# EAGLE board Real Time Clock-Module-Panel-v10 (EAGLE 4.16)
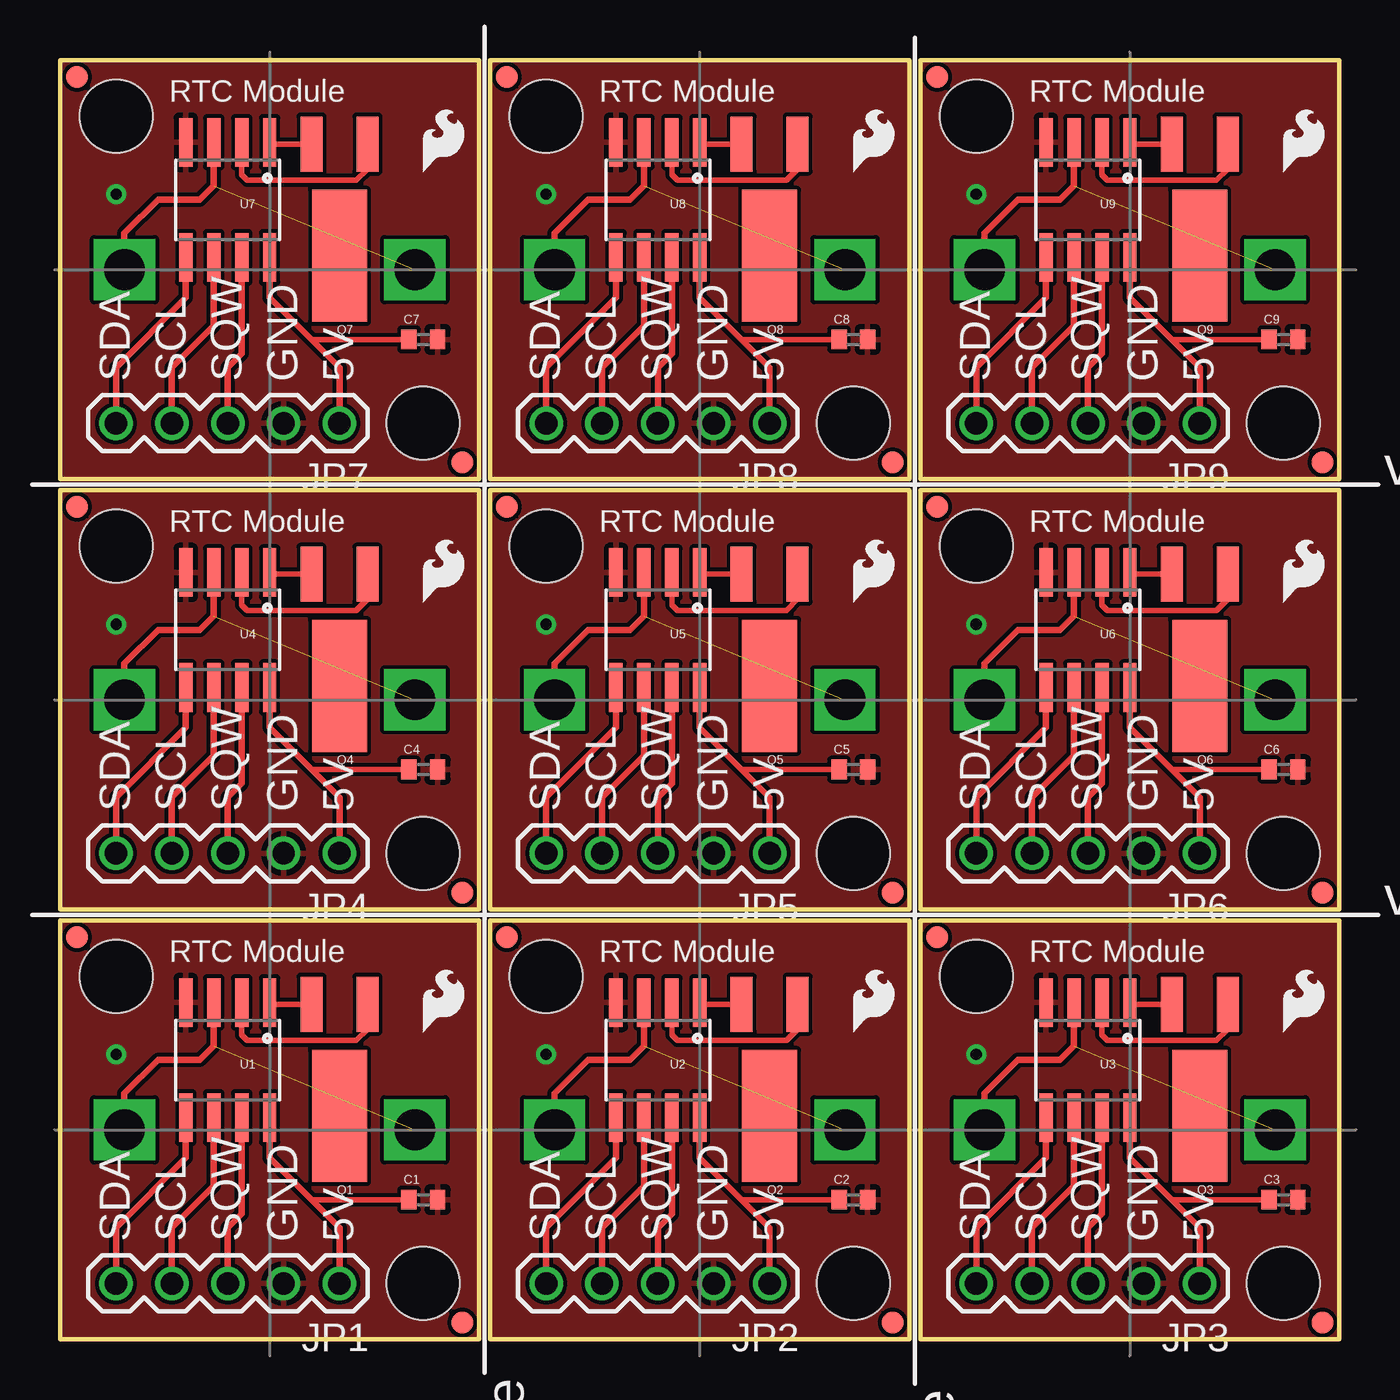
[diagram p0: board, top side]
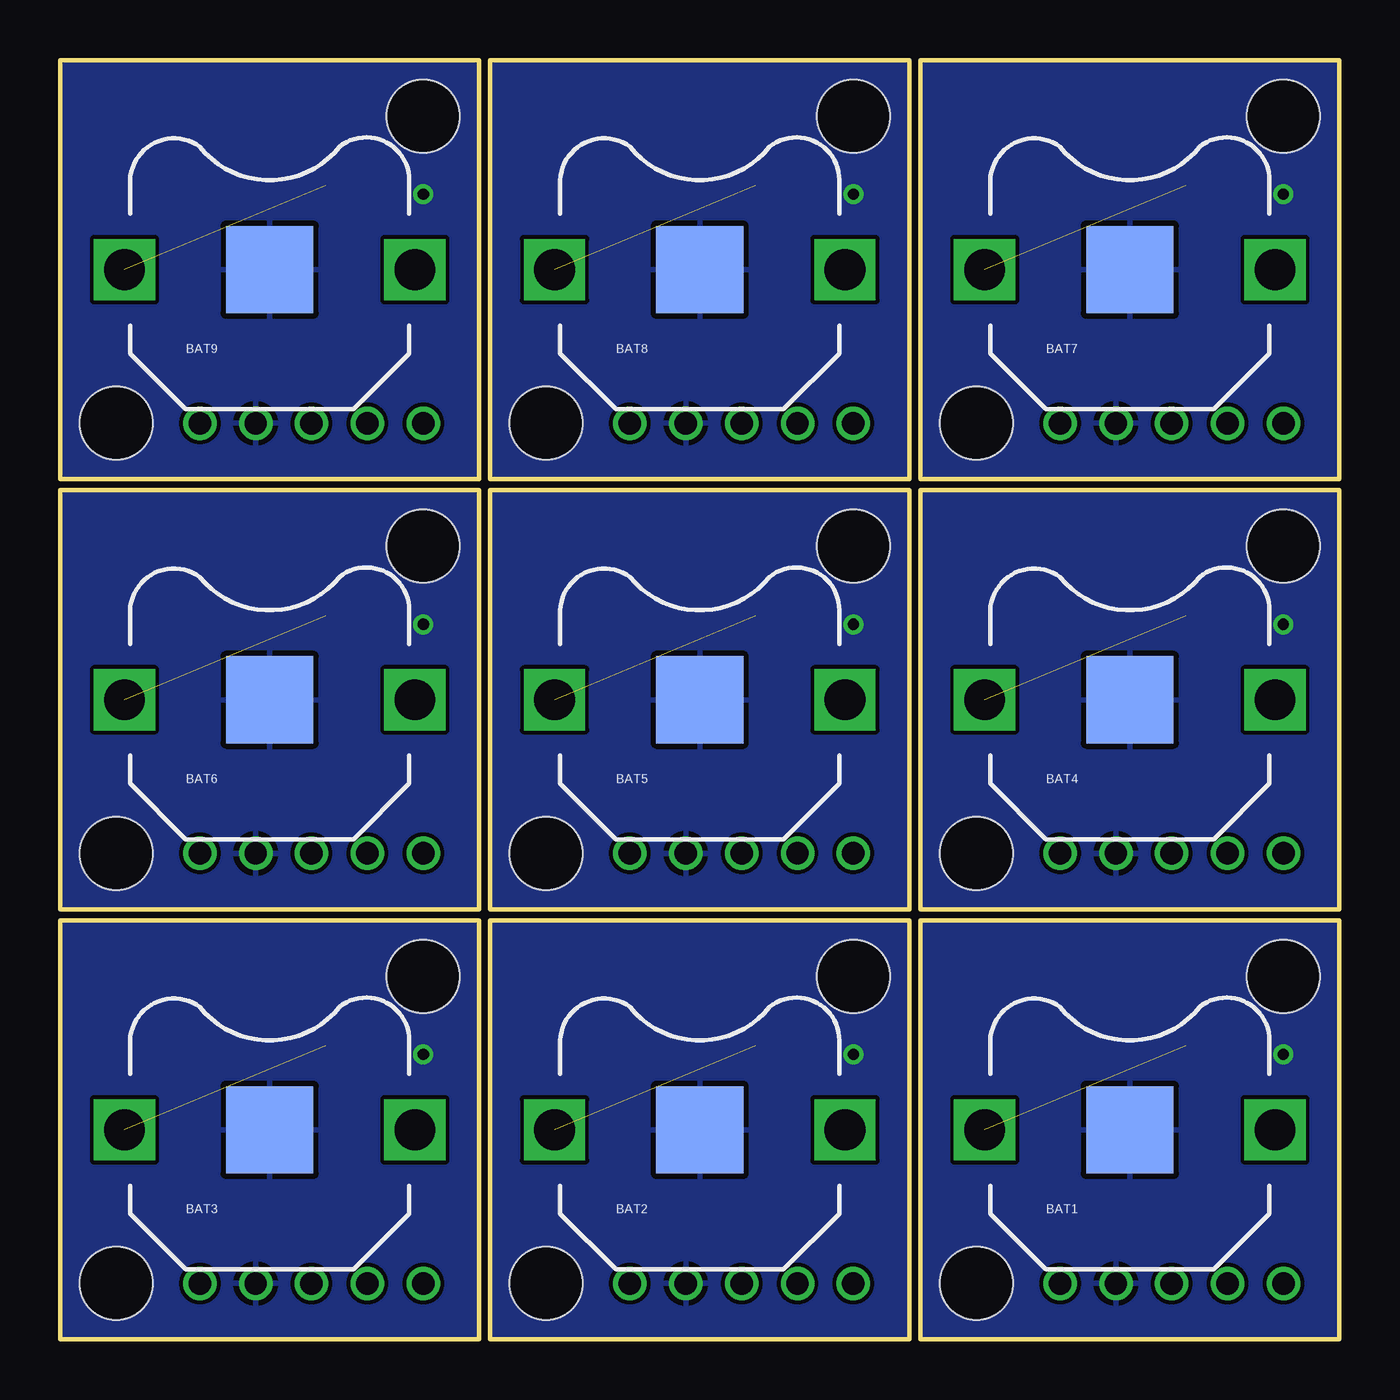
[diagram p1: board, bottom side, seen from below]

Size 58.17 x 58.17 mm. Coordinates in mm from the lower left corner, seen from the top.
Outline: 0,0 19.05,0 19.05,19.05 0,19.05 0,0
Outline: 19.56,0 38.61,0 38.61,19.05 19.56,19.05 19.56,0
Outline: 39.12,0 58.17,0 58.17,19.05 39.12,19.05 39.12,0
Outline: 0,19.56 19.05,19.56 19.05,38.61 0,38.61 0,19.56
Outline: 19.56,19.56 38.61,19.56 38.61,38.61 19.56,38.61 19.56,19.56
Outline: 39.12,19.56 58.17,19.56 58.17,38.61 39.12,38.61 39.12,19.56
Outline: 0,39.12 19.05,39.12 19.05,58.17 0,58.17 0,39.12
Outline: 19.56,39.12 38.61,39.12 38.61,58.17 19.56,58.17 19.56,39.12
Outline: 39.12,39.12 58.17,39.12 58.17,58.17 39.12,58.17 39.12,39.12
Copper layers (1*16): Top 0.035mm / dielectric 1.5mm / Bottom 0.035mm
Design rules "default": minimum track width 8mil, minimum drill 20mil, track to track 7mil, track to pad 7mil, pad to pad 7mil, via to via 7mil, smd to smd 8mil, copper to edge 0mil, drill to drill 8mil, minimum pad ring 10mil, minimum via ring 8mil, stop-mask expansion 4mil, vias tented up to drill 0mil, thermal gap 10mil

## Footprints (pad centres in the part's own frame; a part is rotated, then mirrored left to right if it is on the bottom)
BATTCON_12MM_PTH = smd 3.962 x 3.962: GND 0,0 | drill 1.854 square: VCC@1 -6.604,0; VCC@2 6.604,0
C0402 = smd 0.7 x 0.9: 1 -0.65,0; 2 0.65,0
FIDUCIAL-1X2 = smd 1 x 1: 1 0,0
1X05 = drill 1.016 round: 1 0,0; 2 2.54,0; 3 5.08,0; 4 7.62,0; 5 10.16,0
CRYSTAL-32KHZ-SMD = smd 2.5 x 6: SHEILD 0,5.08 | smd 1 x 2.5: X1 -1.27,0; X2 1.27,0
SO08 = smd 0.61 x 2.21: 1 -1.905,-2.616; 2 -0.635,-2.616; 3 0.635,-2.616; 4 1.905,-2.616; 5 1.905,2.616; 6 0.635,2.616; 7 -0.635,2.616; 8 -1.905,2.616
STAND-OFF = hole 3.302: 0,0

## Placement (x,y rotation side)
BAT1  [BATTCON_12MM_PTH]  9.53,9.53 0 bottom
BAT2  [BATTCON_12MM_PTH]  29.08,9.53 0 bottom
BAT3  [BATTCON_12MM_PTH]  48.64,9.53 0 bottom
BAT4  [BATTCON_12MM_PTH]  9.53,29.08 0 bottom
BAT5  [BATTCON_12MM_PTH]  29.08,29.08 0 bottom
BAT6  [BATTCON_12MM_PTH]  48.64,29.08 0 bottom
BAT7  [BATTCON_12MM_PTH]  9.53,48.64 0 bottom
BAT8  [BATTCON_12MM_PTH]  29.08,48.64 0 bottom
BAT9  [BATTCON_12MM_PTH]  48.64,48.64 0 bottom
C1  [C0402]  16.51,6.35 0 top
C2  [C0402]  36.07,6.35 0 top
C3  [C0402]  55.63,6.35 0 top
C4  [C0402]  16.51,25.91 0 top
C5  [C0402]  36.07,25.91 0 top
C6  [C0402]  55.63,25.91 0 top
C7  [C0402]  16.51,45.47 0 top
C8  [C0402]  36.07,45.47 0 top
C9  [C0402]  55.63,45.47 0 top
E$1  [FIDUCIAL-1X2]  0.76,18.29 0 top
E$2  [FIDUCIAL-1X2]  18.29,0.76 0 top
E$3  [FIDUCIAL-1X2]  20.32,18.29 0 top
E$4  [FIDUCIAL-1X2]  37.85,0.76 0 top
E$5  [FIDUCIAL-1X2]  39.88,18.29 0 top
E$6  [FIDUCIAL-1X2]  57.4,0.76 0 top
E$7  [FIDUCIAL-1X2]  0.76,37.85 0 top
E$8  [FIDUCIAL-1X2]  18.29,20.32 0 top
E$9  [FIDUCIAL-1X2]  20.32,37.85 0 top
E$10  [FIDUCIAL-1X2]  37.85,20.32 0 top
E$11  [FIDUCIAL-1X2]  39.88,37.85 0 top
E$12  [FIDUCIAL-1X2]  57.4,20.32 0 top
E$13  [FIDUCIAL-1X2]  0.76,57.4 0 top
E$14  [FIDUCIAL-1X2]  18.29,39.88 0 top
E$15  [FIDUCIAL-1X2]  20.32,57.4 0 top
E$16  [FIDUCIAL-1X2]  37.85,39.88 0 top
E$17  [FIDUCIAL-1X2]  39.88,57.4 0 top
E$18  [FIDUCIAL-1X2]  57.4,39.88 0 top
JP1  [1X05]  12.7,2.54 180 top
JP2  [1X05]  32.26,2.54 180 top
JP3  [1X05]  51.82,2.54 180 top
JP4  [1X05]  12.7,22.1 180 top
JP5  [1X05]  32.26,22.1 180 top
JP6  [1X05]  51.82,22.1 180 top
JP7  [1X05]  12.7,41.66 180 top
JP8  [1X05]  32.26,41.66 180 top
JP9  [1X05]  51.82,41.66 180 top
Q1  32.768kHz  [CRYSTAL-32KHZ-SMD]  12.7,15.24 180 top
Q2  32.768kHz  [CRYSTAL-32KHZ-SMD]  32.26,15.24 180 top
Q3  32.768kHz  [CRYSTAL-32KHZ-SMD]  51.82,15.24 180 top
Q4  32.768kHz  [CRYSTAL-32KHZ-SMD]  12.7,34.8 180 top
Q5  32.768kHz  [CRYSTAL-32KHZ-SMD]  32.26,34.8 180 top
Q6  32.768kHz  [CRYSTAL-32KHZ-SMD]  51.82,34.8 180 top
Q7  32.768kHz  [CRYSTAL-32KHZ-SMD]  12.7,54.36 180 top
Q8  32.768kHz  [CRYSTAL-32KHZ-SMD]  32.26,54.36 180 top
Q9  32.768kHz  [CRYSTAL-32KHZ-SMD]  51.82,54.36 180 top
U1  DS1307  [SO08]  7.62,12.7 180 top
U2  DS1307  [SO08]  27.18,12.7 180 top
U3  DS1307  [SO08]  46.74,12.7 180 top
U4  DS1307  [SO08]  7.62,32.26 180 top
U5  DS1307  [SO08]  27.18,32.26 180 top
U6  DS1307  [SO08]  46.74,32.26 180 top
U7  DS1307  [SO08]  7.62,51.82 180 top
U8  DS1307  [SO08]  27.18,51.82 180 top
U9  DS1307  [SO08]  46.74,51.82 180 top
U$1  LOGO-SFESK  [SFE-LOGO-FLAME]  16.51,13.97 0 top
U$2  LOGO-SFESK  [SFE-LOGO-FLAME]  36.07,13.97 0 top
U$3  STAND-OFF  [STAND-OFF]  36.07,2.54 0 top
U$4  STAND-OFF  [STAND-OFF]  22.1,16.51 0 top
U$5  LOGO-SFESK  [SFE-LOGO-FLAME]  55.63,13.97 0 top
U$6  STAND-OFF  [STAND-OFF]  16.51,2.54 0 top
U$7  STAND-OFF  [STAND-OFF]  2.54,16.51 0 top
U$8  STAND-OFF  [STAND-OFF]  55.63,2.54 0 top
U$9  STAND-OFF  [STAND-OFF]  41.66,16.51 0 top
U$10  LOGO-SFESK  [SFE-LOGO-FLAME]  16.51,33.53 0 top
U$11  STAND-OFF  [STAND-OFF]  16.51,22.1 0 top
U$12  STAND-OFF  [STAND-OFF]  2.54,36.07 0 top
U$13  LOGO-SFESK  [SFE-LOGO-FLAME]  36.07,33.53 0 top
U$14  STAND-OFF  [STAND-OFF]  36.07,22.1 0 top
U$15  STAND-OFF  [STAND-OFF]  22.1,36.07 0 top
U$16  LOGO-SFESK  [SFE-LOGO-FLAME]  55.63,33.53 0 top
U$17  STAND-OFF  [STAND-OFF]  55.63,22.1 0 top
U$18  STAND-OFF  [STAND-OFF]  41.66,36.07 0 top
U$19  LOGO-SFESK  [SFE-LOGO-FLAME]  16.51,53.09 0 top
U$20  STAND-OFF  [STAND-OFF]  16.51,41.66 0 top
U$21  STAND-OFF  [STAND-OFF]  2.54,55.63 0 top
U$22  LOGO-SFESK  [SFE-LOGO-FLAME]  36.07,53.09 0 top
U$23  STAND-OFF  [STAND-OFF]  36.07,41.66 0 top
U$24  STAND-OFF  [STAND-OFF]  22.1,55.63 0 top
U$25  LOGO-SFESK  [SFE-LOGO-FLAME]  55.63,53.09 0 top
U$26  STAND-OFF  [STAND-OFF]  55.63,41.66 0 top
U$27  STAND-OFF  [STAND-OFF]  41.66,55.63 0 top

## Library data of the parts
BAT1-BAT9 C1-C9 E$1-E$18 JP1-JP9 Q1-Q9 U1-U9 U$1-U$27 = SparkFun

## Nets
GND: BAT1.GND C1.2 JP1.2 U1.4
GND1: BAT2.GND C2.2 JP2.2 U2.4
GND2: BAT3.GND C3.2 JP3.2 U3.4
GND3: BAT4.GND C4.2 JP4.2 U4.4
GND4: BAT5.GND C5.2 JP5.2 U5.4
GND5: BAT6.GND C6.2 JP6.2 U6.4
GND6: BAT7.GND C7.2 JP7.2 U7.4
GND7: BAT8.GND C8.2 JP8.2 U8.4
GND8: BAT9.GND C9.2 JP9.2 U9.4
N$1: Q1.X2 U1.1
N$2: Q1.X1 U1.2
N$3: Q2.X2 U2.1
N$4: BAT1.VCC@1 U1.3
N$5: Q2.X1 U2.2
N$6: BAT2.VCC@1 U2.3
N$7: Q3.X2 U3.1
N$8: Q3.X1 U3.2
N$9: BAT3.VCC@1 U3.3
N$10: Q4.X2 U4.1
N$11: Q4.X1 U4.2
N$12: BAT4.VCC@1 U4.3
N$13: Q5.X2 U5.1
N$14: Q5.X1 U5.2
N$15: BAT5.VCC@1 U5.3
N$16: Q6.X2 U6.1
N$17: Q6.X1 U6.2
N$18: BAT6.VCC@1 U6.3
N$19: Q7.X2 U7.1
N$20: Q7.X1 U7.2
N$21: BAT7.VCC@1 U7.3
N$22: Q8.X2 U8.1
N$23: Q8.X1 U8.2
N$24: BAT8.VCC@1 U8.3
N$25: Q9.X2 U9.1
N$26: Q9.X1 U9.2
N$27: BAT9.VCC@1 U9.3
SCL: JP1.4 U1.6
SCL1: JP2.4 U2.6
SCL2: JP3.4 U3.6
SCL3: JP4.4 U4.6
SCL4: JP5.4 U5.6
SCL5: JP6.4 U6.6
SCL6: JP7.4 U7.6
SCL7: JP8.4 U8.6
SCL8: JP9.4 U9.6
SDA: JP1.5 U1.5
SDA1: JP2.5 U2.5
SDA2: JP3.5 U3.5
SDA3: JP4.5 U4.5
SDA4: JP5.5 U5.5
SDA5: JP6.5 U6.5
SDA6: JP7.5 U7.5
SDA7: JP8.5 U8.5
SDA8: JP9.5 U9.5
SQW: JP1.3 U1.7
SQW1: JP2.3 U2.7
SQW2: JP3.3 U3.7
SQW3: JP4.3 U4.7
SQW4: JP5.3 U5.7
SQW5: JP6.3 U6.7
SQW6: JP7.3 U7.7
SQW7: JP8.3 U8.7
SQW8: JP9.3 U9.7
VCC: C1.1 JP1.1 U1.8
VCC1: C2.1 JP2.1 U2.8
VCC2: C3.1 JP3.1 U3.8
VCC3: C4.1 JP4.1 U4.8
VCC4: C5.1 JP5.1 U5.8
VCC5: C6.1 JP6.1 U6.8
VCC6: C7.1 JP7.1 U7.8
VCC7: C8.1 JP8.1 U8.8
VCC8: C9.1 JP9.1 U9.8

## Tracks (layer width: path | path; a pad name or v marks a point on that pad's centre or on a via)
GND  (via drill 0.51)
  other vias: 2.54,12.95
  pour Bottom: 0,0 0,19.05 19.05,19.05 19.05,0
  pour Top: 0,19.05 0,0 19.05,0 19.05,19.05
GND1  (via drill 0.51)
  other vias: 22.1,12.95
  pour Bottom: 19.56,0 19.56,19.05 38.61,19.05 38.61,0
  pour Top: 19.56,19.05 19.56,0 38.61,0 38.61,19.05
GND2  (via drill 0.51)
  other vias: 41.66,12.95
  pour Bottom: 39.12,0 39.12,19.05 58.17,19.05 58.17,0
  pour Top: 39.12,19.05 39.12,0 58.17,0 58.17,19.05
GND3  (via drill 0.51)
  other vias: 2.54,32.51
  pour Bottom: 0,19.56 0,38.61 19.05,38.61 19.05,19.56
  pour Top: 0,38.61 0,19.56 19.05,19.56 19.05,38.61
GND4  (via drill 0.51)
  other vias: 22.1,32.51
  pour Bottom: 19.56,19.56 19.56,38.61 38.61,38.61 38.61,19.56
  pour Top: 19.56,38.61 19.56,19.56 38.61,19.56 38.61,38.61
GND5  (via drill 0.51)
  other vias: 41.66,32.51
  pour Bottom: 39.12,19.56 39.12,38.61 58.17,38.61 58.17,19.56
  pour Top: 39.12,38.61 39.12,19.56 58.17,19.56 58.17,38.61
GND6  (via drill 0.51)
  other vias: 2.54,52.07
  pour Bottom: 0,39.12 0,58.17 19.05,58.17 19.05,39.12
  pour Top: 0,58.17 0,39.12 19.05,39.12 19.05,58.17
GND7  (via drill 0.51)
  other vias: 22.1,52.07
  pour Bottom: 19.56,39.12 19.56,58.17 38.61,58.17 38.61,39.12
  pour Top: 19.56,58.17 19.56,39.12 38.61,39.12 38.61,58.17
GND8  (via drill 0.51)
  other vias: 41.66,52.07
  pour Bottom: 39.12,39.12 39.12,58.17 58.17,58.17 58.17,39.12
  pour Top: 39.12,58.17 39.12,39.12 58.17,39.12 58.17,58.17
N$1
  Top 0.254: U1.1 9.53,15.24 Q1.X2
N$2
  Top 0.254: Q1.X1 13.97,14.1 13.46,13.59 8.51,13.59 8.26,13.84 U1.2
  Top 0.305: U1.2 8.26,15.37
N$3
  Top 0.254: U2.1 29.08,15.24 Q2.X2
N$4  (1 unrouted)
  Top 0.305: U1.3 6.99,13.34 6.35,12.7 4.45,12.7 2.92,11.18 2.92,9.53
N$5
  Top 0.254: Q2.X1 33.53,14.1 33.02,13.59 28.07,13.59 27.81,13.84 U2.2
  Top 0.305: U2.2 27.81,15.37
N$6  (1 unrouted)
  Top 0.305: U2.3 26.54,13.34 25.91,12.7 24,12.7 22.48,11.18 22.48,9.53
N$7
  Top 0.254: U3.1 48.64,15.24 Q3.X2
N$8
  Top 0.254: Q3.X1 53.09,14.1 52.58,13.59 47.62,13.59 47.37,13.84 U3.2
  Top 0.305: U3.2 47.37,15.37
N$9  (1 unrouted)
  Top 0.305: U3.3 46.1,13.34 45.47,12.7 43.56,12.7 42.04,11.18 42.04,9.53
N$10
  Top 0.254: U4.1 9.53,34.8 Q4.X2
N$11
  Top 0.254: Q4.X1 13.97,33.66 13.46,33.15 8.51,33.15 8.26,33.4 U4.2
  Top 0.305: U4.2 8.26,34.92
N$12  (1 unrouted)
  Top 0.305: U4.3 6.99,32.89 6.35,32.26 4.45,32.26 2.92,30.73 2.92,29.08
N$13
  Top 0.254: U5.1 29.08,34.8 Q5.X2
N$14
  Top 0.254: Q5.X1 33.53,33.66 33.02,33.15 28.07,33.15 27.81,33.4 U5.2
  Top 0.305: U5.2 27.81,34.92
N$15  (1 unrouted)
  Top 0.305: U5.3 26.54,32.89 25.91,32.26 24,32.26 22.48,30.73 22.48,29.08
N$16
  Top 0.254: U6.1 48.64,34.8 Q6.X2
N$17
  Top 0.254: Q6.X1 53.09,33.66 52.58,33.15 47.62,33.15 47.37,33.4 U6.2
  Top 0.305: U6.2 47.37,34.92
N$18  (1 unrouted)
  Top 0.305: U6.3 46.1,32.89 45.47,32.26 43.56,32.26 42.04,30.73 42.04,29.08
N$19
  Top 0.254: U7.1 9.53,54.36 Q7.X2
N$20
  Top 0.254: Q7.X1 13.97,53.21 13.46,52.7 8.51,52.7 8.26,52.96 U7.2
  Top 0.305: U7.2 8.26,54.48
N$21  (1 unrouted)
  Top 0.305: U7.3 6.99,52.45 6.35,51.82 4.45,51.82 2.92,50.29 2.92,48.64
N$22
  Top 0.254: U8.1 29.08,54.36 Q8.X2
N$23
  Top 0.254: Q8.X1 33.53,53.21 33.02,52.7 28.07,52.7 27.81,52.96 U8.2
  Top 0.305: U8.2 27.81,54.48
N$24  (1 unrouted)
  Top 0.305: U8.3 26.54,52.45 25.91,51.82 24,51.82 22.48,50.29 22.48,48.64
N$25
  Top 0.254: U9.1 48.64,54.36 Q9.X2
N$26
  Top 0.254: Q9.X1 53.09,53.21 52.58,52.7 47.62,52.7 47.37,52.96 U9.2
  Top 0.305: U9.2 47.37,54.48
N$27  (1 unrouted)
  Top 0.305: U9.3 46.1,52.45 45.47,51.82 43.56,51.82 42.04,50.29 42.04,48.64
SCL
  Top 0.305: U1.6 6.99,6.99 5.08,5.08 JP1.4
SCL1
  Top 0.305: U2.6 26.54,6.99 24.64,5.08 JP2.4
SCL2
  Top 0.305: U3.6 46.1,6.99 44.2,5.08 JP3.4
SCL3
  Top 0.305: U4.6 6.99,26.54 5.08,24.64 JP4.4
SCL4
  Top 0.305: U5.6 26.54,26.54 24.64,24.64 JP5.4
SCL5
  Top 0.305: U6.6 46.1,26.54 44.2,24.64 JP6.4
SCL6
  Top 0.305: U7.6 6.99,46.1 5.08,44.2 JP7.4
SCL7
  Top 0.305: U8.6 26.54,46.1 24.64,44.2 JP8.4
SCL8
  Top 0.305: U9.6 46.1,46.1 44.2,44.2 JP9.4
SDA
  Top 0.305: U1.5 5.71,8.26 2.54,5.08 JP1.5
SDA1
  Top 0.305: U2.5 25.27,8.26 22.1,5.08 JP2.5
SDA2
  Top 0.305: U3.5 44.83,8.26 41.66,5.08 JP3.5
SDA3
  Top 0.305: U4.5 5.71,27.81 2.54,24.64 JP4.5
SDA4
  Top 0.305: U5.5 25.27,27.81 22.1,24.64 JP5.5
SDA5
  Top 0.305: U6.5 44.83,27.81 41.66,24.64 JP6.5
SDA6
  Top 0.305: U7.5 5.71,47.37 2.54,44.2 JP7.5
SDA7
  Top 0.305: U8.5 25.27,47.37 22.1,44.2 JP8.5
SDA8
  Top 0.305: U9.5 44.83,47.37 41.66,44.2 JP9.5
SQW
  Top 0.305: U1.7 8.26,5.71 7.62,5.08 JP1.3
SQW1
  Top 0.305: U2.7 27.81,5.71 27.18,5.08 JP2.3
SQW2
  Top 0.305: U3.7 47.37,5.71 46.74,5.08 JP3.3
SQW3
  Top 0.305: U4.7 8.26,25.27 7.62,24.64 JP4.3
SQW4
  Top 0.305: U5.7 27.81,25.27 27.18,24.64 JP5.3
SQW5
  Top 0.305: U6.7 47.37,25.27 46.74,24.64 JP6.3
SQW6
  Top 0.305: U7.7 8.26,44.83 7.62,44.2 JP7.3
SQW7
  Top 0.305: U8.7 27.81,44.83 27.18,44.2 JP8.3
SQW8
  Top 0.305: U9.7 47.37,44.83 46.74,44.2 JP9.3
VCC
  Top 0.254: 11.43,6.35 C1.1
  Top 0.305: U1.8 9.53,9.53 | 9.53,9.53 9.53,8.26 11.43,6.35 12.7,5.08 JP1.1 | 9.53,9.53 9.54,9.51
VCC1
  Top 0.254: 30.99,6.35 C2.1
  Top 0.305: U2.8 29.08,9.53 | 29.08,9.53 29.08,8.26 30.99,6.35 32.26,5.08 JP2.1 | 29.08,9.53 29.1,9.51
VCC2
  Top 0.254: 50.55,6.35 C3.1
  Top 0.305: U3.8 48.64,9.53 | 48.64,9.53 48.64,8.26 50.55,6.35 51.82,5.08 JP3.1 | 48.64,9.53 48.66,9.51
VCC3
  Top 0.254: 11.43,25.91 C4.1
  Top 0.305: U4.8 9.53,29.08 | 9.53,29.08 9.53,27.81 11.43,25.91 12.7,24.64 JP4.1 | 9.53,29.08 9.54,29.07
VCC4
  Top 0.254: 30.99,25.91 C5.1
  Top 0.305: U5.8 29.08,29.08 | 29.08,29.08 29.08,27.81 30.99,25.91 32.26,24.64 JP5.1 | 29.08,29.08 29.1,29.07
VCC5
  Top 0.254: 50.55,25.91 C6.1
  Top 0.305: U6.8 48.64,29.08 | 48.64,29.08 48.64,27.81 50.55,25.91 51.82,24.64 JP6.1 | 48.64,29.08 48.66,29.07
VCC6
  Top 0.254: 11.43,45.47 C7.1
  Top 0.305: U7.8 9.53,48.64 | 9.53,48.64 9.53,47.37 11.43,45.47 12.7,44.2 JP7.1 | 9.53,48.64 9.54,48.63
VCC7
  Top 0.254: 30.99,45.47 C8.1
  Top 0.305: U8.8 29.08,48.64 | 29.08,48.64 29.08,47.37 30.99,45.47 32.26,44.2 JP8.1 | 29.08,48.64 29.1,48.63
VCC8
  Top 0.254: 50.55,45.47 C9.1
  Top 0.305: U9.8 48.64,48.64 | 48.64,48.64 48.64,47.37 50.55,45.47 51.82,44.2 JP9.1 | 48.64,48.64 48.66,48.63

## Text on the board
tPlace: RTC Module | RTC Module | RTC Module | SDA | SCL | SQW | GND | 5V | SDA | SCL | SQW | GND | 5V | SDA | SCL | SQW | GND | 5V | vScore | RTC Module | RTC Module | RTC Module | SDA | SCL | SQW | GND | 5V | SDA | SCL | SQW | GND | 5V | SDA | SCL | SQW | GND | 5V | vScore | RTC Module | RTC Module | RTC Module | SDA | SCL | SQW | GND | 5V | SDA | SCL | SQW | GND | 5V | SDA | SCL | SQW | GND | 5V | vScore | vScore